# Altium PCB PCB_Board_4_Layout.PcbDoc
Units mil, origin at the board's own origin, x right, y up, seen from the top; angles counter-clockwise.
Board outline 4315 x 2510 mil, 4 copper layers (Top Layer 1, Ground 1, Ground 2, Bottom Layer 1), stack 70.112 mil thick; 80 components, 45 nets, 287 pads, 89 vias.
Unrouted connection lines stored in the file: 3.
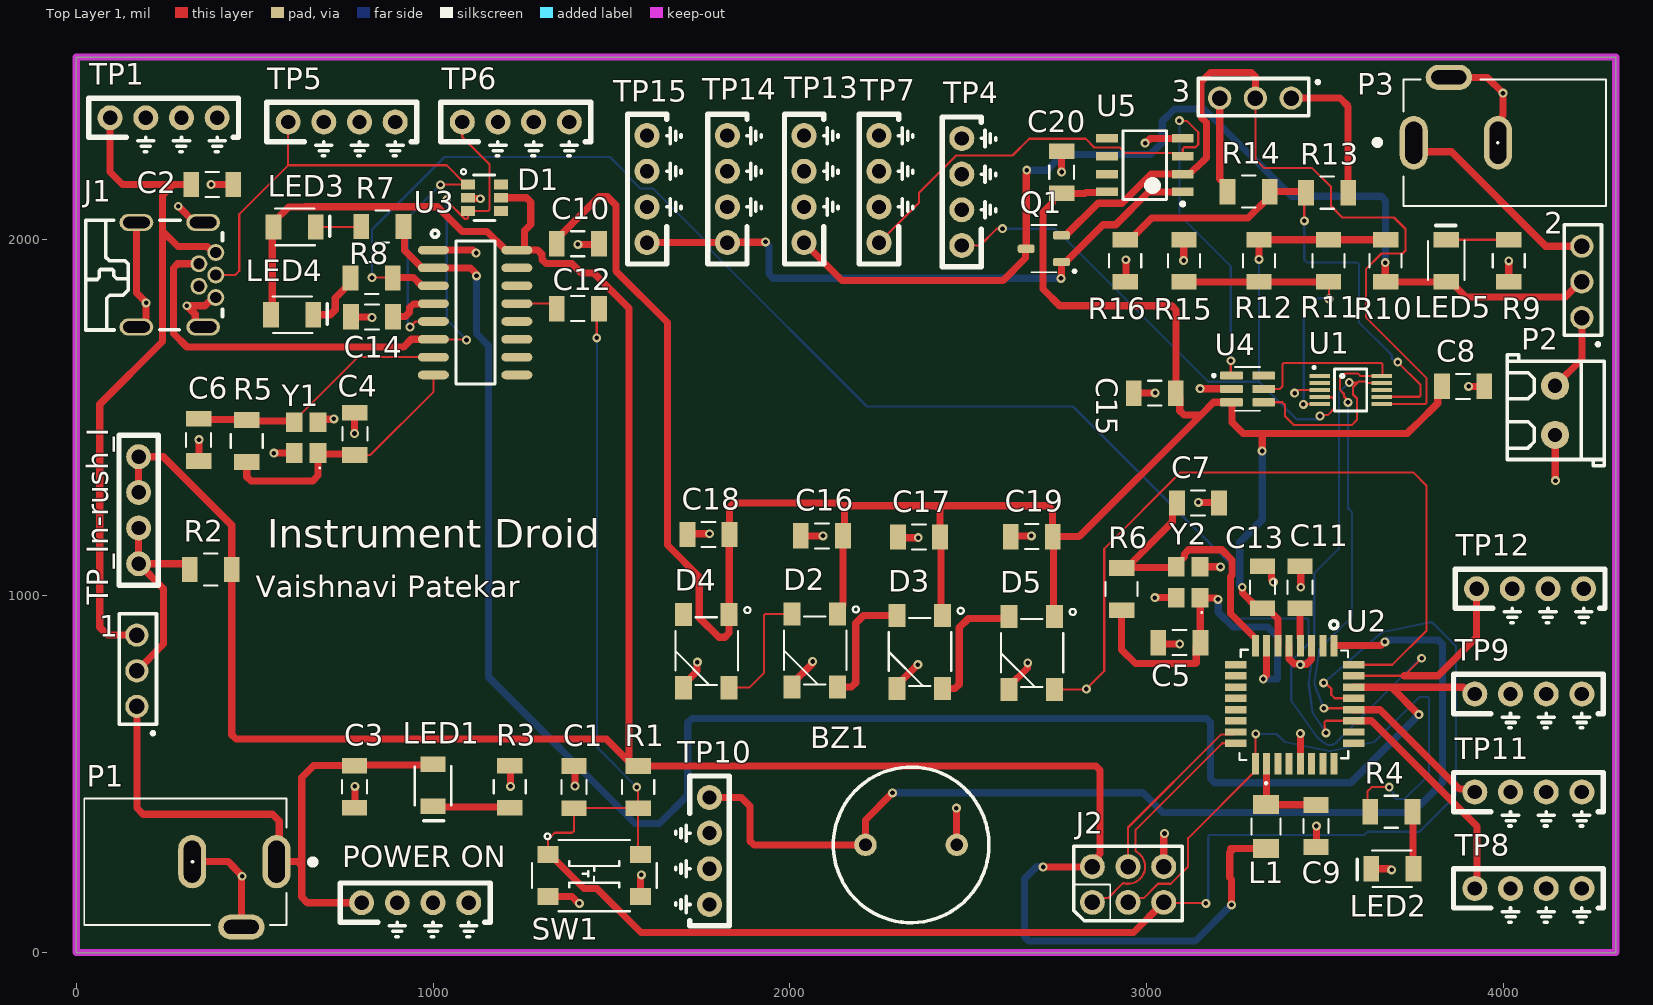
[diagram p0: Top Layer 1 view]
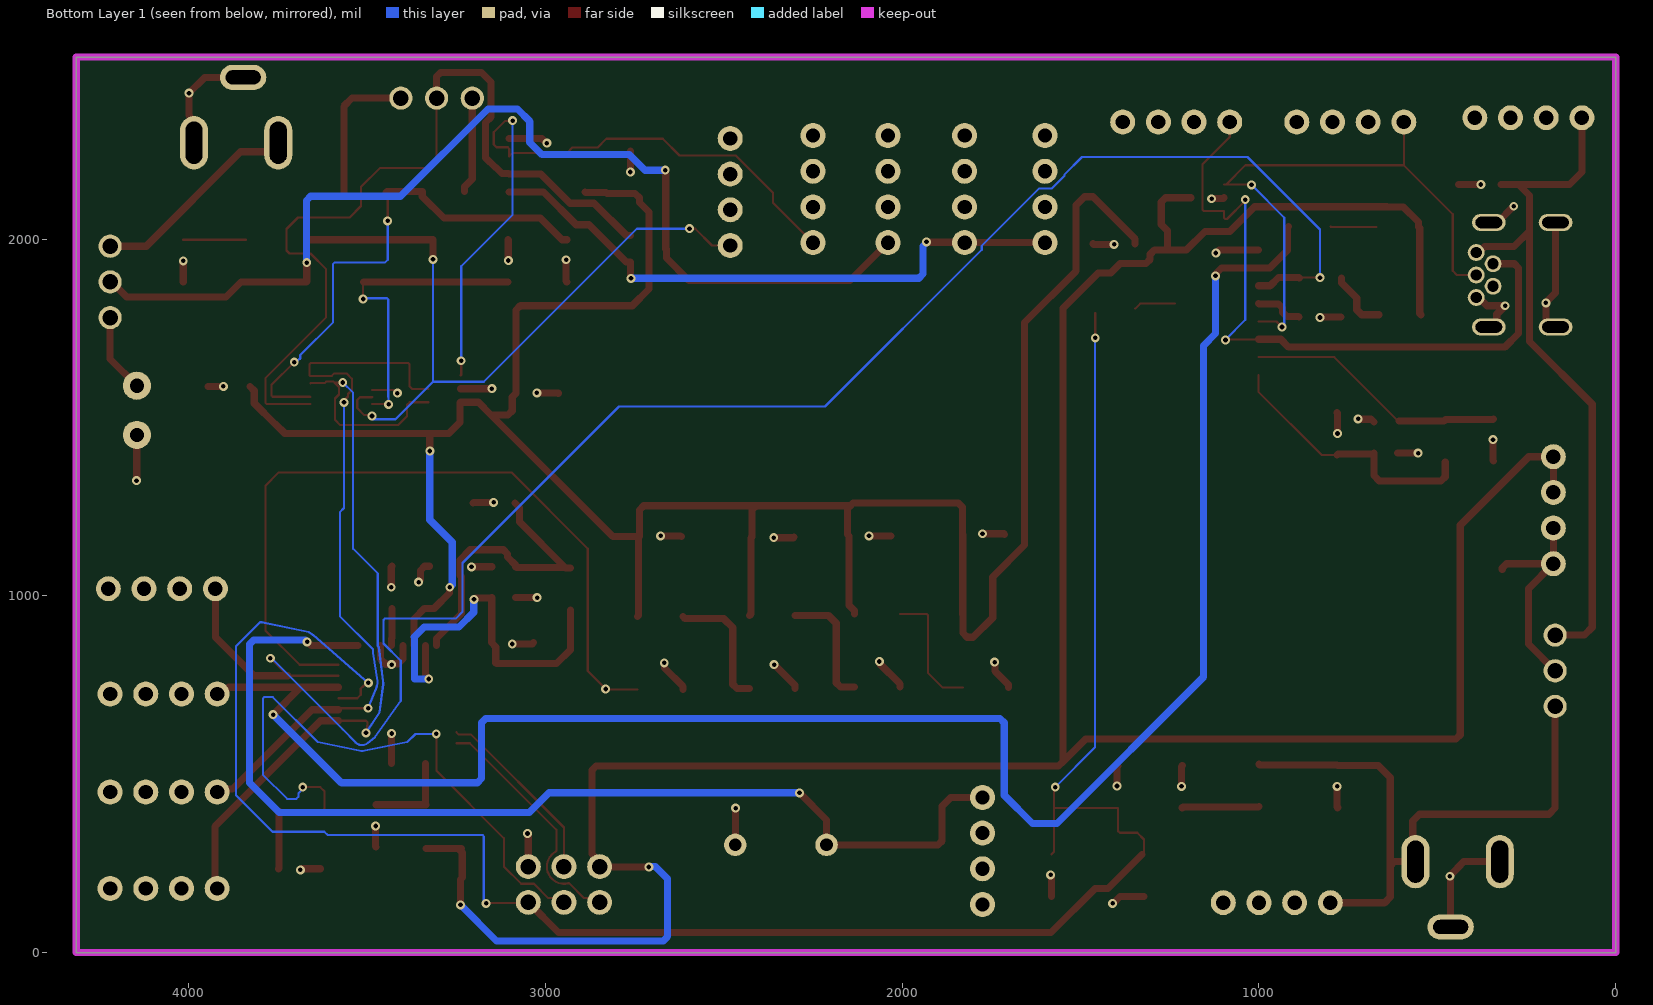
[diagram p1: Bottom Layer 1 view, seen from below]
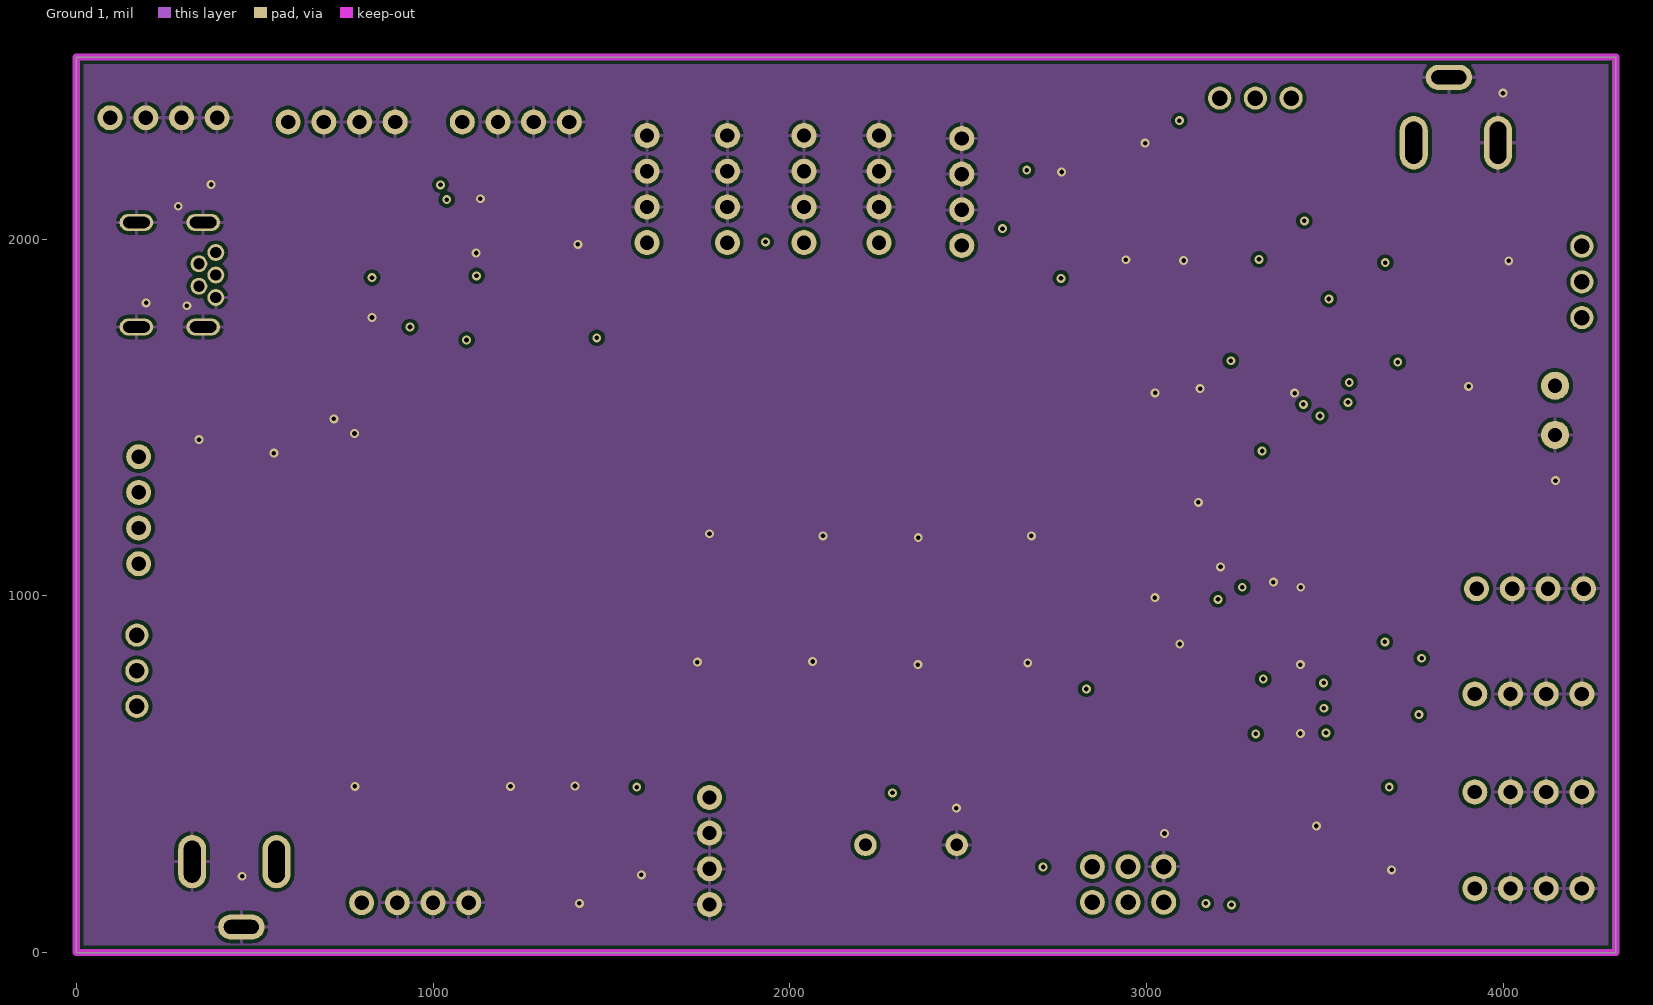
[diagram p2: Ground 1]
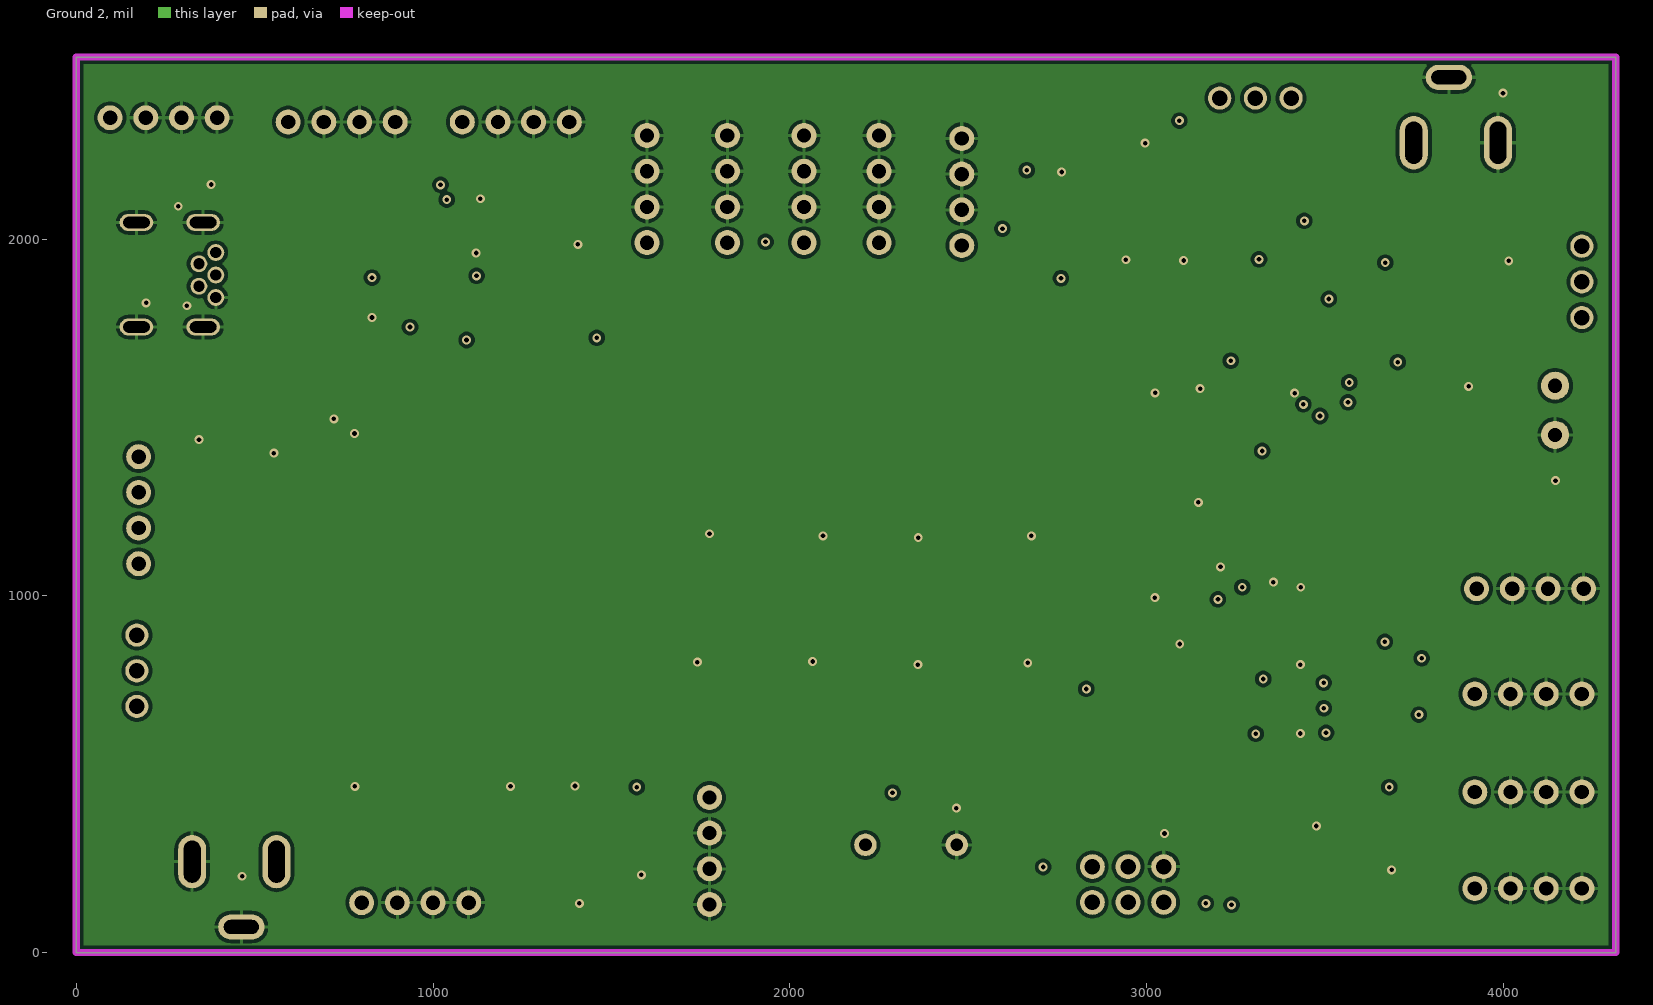
[diagram p3: Ground 2]
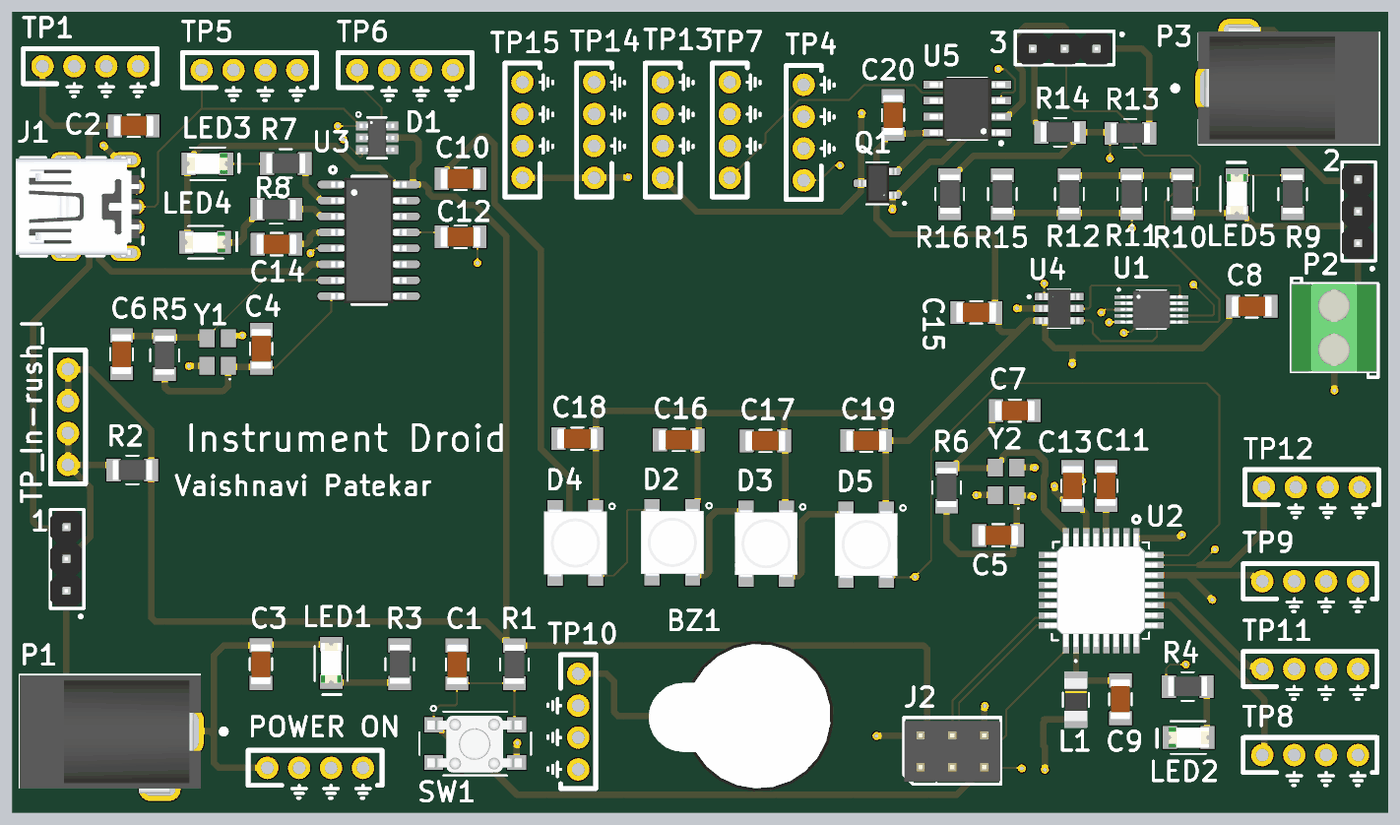
[diagram p4: 3D render of the assembled board from above, using the file's embedded part models]

## Layer stack, top to bottom
Top Solder: solder mask 0.4, Solder Resist, Dk 3.5
Top Layer 1: signal copper 1.378
Dielectric 2: prepreg 2.8, PP-006, Dk 4.1
Ground 1: signal copper 1.378
Dielectric 1: core 59, Core-043, Dk 4.3
Ground 2: signal copper 1.378
Dielectric 3: prepreg 2.8, PP-006, Dk 4.1
Bottom Layer 1: signal copper 1.378
Bottom Solder: solder mask 0.4, Solder Resist, Dk 3.5

## Board outline
0,0 4315,0 4315,2510 0,2510

## Design rules (kind name [scope] priority, off if disabled: settings)
BoardOutlineClearance [All] p1: gap=10 ignorepadtopadclearanceinfootprint=FALSE except(0: Arc-SplitContinuation Track-SplitContinuation SMDPad-SplitContinuation THPad-SplitContinuation Via-SplitContinuation Fill-SplitContinuation Poly-SplitContinuation Region-SplitContinuation Text-SplitContinuation)
Clearance [All] p1: gap=10 ignorepadtopadclearanceinfootprint=FALSE
HoleSize [All] p1: absolutevalues=TRUE maxlimit=120 minlimit=1 maxpercent=80.000 minpercent=20.000
PlaneClearance [All] p1: clearance=10
PlaneConnect [All] p1: planeconnectstyle=Direct reliefexpansion=20 reliefentries=4 reliefconductorwidth=10 reliefairgap=10
PolygonConnect [All] p1: thpad.connectstyle=Relief thpad.reliefconductorwidth=10 thpad.reliefentries=4 thpad.polygonreliefangle="90 Angle" thpad.airgapwidth=10 smdpad.connectstyle=Direct smdpad.reliefconductorwidth=10 smdpad.reliefentries=4 smdpad.polygonreliefangle="90 Angle" smdpad.airgapwidth=10 via.connectstyle=Direct via.reliefconductorwidth=10 via.reliefentries=4 via.polygonreliefangle="90 Angle" via.airgapwidth=10
RoutingVias [All] p1: holewidth=13 width=25 viastyle="Through Hole" minholewidth=13 minwidth=25 maxholewidth=60 maxwidth=80
SolderMaskExpansion [All] p1: expansion=4 istentingtop=FALSE
UnRoutedNet [All] p1: checkbadconnections=TRUE
Width "Schematic Width Constraint_5" [InNet('+5')] p1: maxlimit=100 minlimit=10 preferedwidth=20 toplayer_minwidth=20 midlayer1_maxwidth=10 midlayer1_prefwidth=10 midlayer2_maxwidth=10 midlayer2_prefwidth=10 bottomlayer_minwidth=20 minimp=50.000000 maximp=50.000000 favimp=50.000000
Width "Schematic Width Constraint_4" [InNet('GND')] p2: maxlimit=100 minlimit=10 preferedwidth=20 toplayer_minwidth=20 midlayer1_maxwidth=10 midlayer1_prefwidth=10 midlayer2_maxwidth=10 midlayer2_prefwidth=10 bottomlayer_minwidth=20 minimp=50.000000 maximp=50.000000 favimp=50.000000
Width "Schematic Width Constraint_3" [InNet('ADP_+5V')] p3: maxlimit=100 minlimit=10 preferedwidth=20 toplayer_minwidth=20 midlayer1_maxwidth=10 midlayer1_prefwidth=10 midlayer2_maxwidth=10 midlayer2_prefwidth=10 bottomlayer_minwidth=20 minimp=50.000000 maximp=50.000000 favimp=50.000000
Width "Schematic Width Constraint_2" [InNet('+5V')] p4: maxlimit=100 minlimit=10 preferedwidth=20 toplayer_minwidth=20 midlayer1_maxwidth=10 midlayer1_prefwidth=10 midlayer2_maxwidth=10 midlayer2_prefwidth=10 bottomlayer_minwidth=20 minimp=50.000000 maximp=50.000000 favimp=50.000000
Width "Schematic Width Constraint" [InNet('USB_+5V')] p5: maxlimit=100 minlimit=10 preferedwidth=20 toplayer_minwidth=20 midlayer1_maxwidth=10 midlayer1_prefwidth=10 midlayer2_maxwidth=10 midlayer2_prefwidth=10 bottomlayer_minwidth=20 minimp=50.000000 maximp=50.000000 favimp=50.000000
Width [All] p6: maxlimit=100 minlimit=6 preferedwidth=6 minimp=50.000000 maximp=50.000000 favimp=50.000000
26 further rules are at their usual default settings.

## Components (designator, comment, footprint, x,y, rotation, side; value= is the part's Value field where it differs from the comment)
1 "PREC003SAAN-RC" 3_PIN_100mil 170,690 r90 top value="CONN HEADER VERT 3POS 2.54MM"
2 "PREC003SAAN-RC" 3_PIN_100mil 4220,1780 r90 top value="CONN HEADER VERT 3POS 2.54MM"
3 "PREC003SAAN-RC" 3_PIN_100mil 3405,2395 r180 top value="CONN HEADER VERT 3POS 2.54MM"
BZ1 "AT-1224-TWT-5V-2-R" "BUZZER- TH" 2340,302 r90 top
C1 "1uF" 1206_Passive_Capacitor 1395,464 r90 top
C2 "22uF" 1206_Passive_Capacitor 381,2153 r180 top
C3 "22uF" 1206_Passive_Capacitor 780,465 r90 top
C4 "22pF" 1206_Passive_Capacitor 781,1454 r270 top
C5 "22pF" 1206_Passive_Capacitor 3092,869 r0 top
C6 "22pF" 1206_Passive_Capacitor 343,1437 r90 top
C7 "22pF" 1206_Passive_Capacitor 3144,1260 r180 top
C8 "22uF" 1206_Passive_Capacitor 3887,1587 r0 top
C9 "22uF" 1206_Passive_Capacitor 3475,355 r90 top
C10 "22uF" 1206_Passive_Capacitor 1406,1987 r180 top
C11 "22uF" 1206_Passive_Capacitor 3430,1024 r270 top
C12 "22uF" 1206_Passive_Capacitor 1406,1805 r180 top
C13 "22uF" 1206_Passive_Capacitor 3325,1024 r270 top
C14 "22uF" 1206_Passive_Capacitor 829,1782 r180 top
C15 "22uF" 1206_Passive_Capacitor 3023,1568 r180 top
C16 "22uF" 1206_Passive_Capacitor 2090,1168 r0 top
C17 "22uF" 1206_Passive_Capacitor 2362,1165 r0 top
C18 "22uF" 1206_Passive_Capacitor 1772,1172 r180 top
C19 "22uF" 1206_Passive_Capacitor 2678,1166 r0 top
C20 "22uF" 1206_Passive_Capacitor 2762,2187 r90 top
D1 "SRV05-4-P-T7" TVS 1143.77,2115.6 r0 top value="TVS DIODE 5.5V 6TSOP"
D2 "IN-PI55QATPRPGPBPW" "SERIAL_LED - duplicate" 2070,847 r270 top
D3 "IN-PI55QATPRPGPBPW" "SERIAL_LED - duplicate" 2364,843 r270 top
D4 "IN-PI55QATPRPGPBPW" "SERIAL_LED - duplicate" 1766,845 r270 top
D5 "IN-PI55QATPRPGPBPW" "SERIAL_LED - duplicate" 2678,840 r270 top
J1 "USB Mini" USB_MINI_B 280,1900 r270 top value="USB mini B"
J2 "NRPN032PAEN-RC" ICSP 2848,141 r90 top
L1 "FB_10uH_1206" AIML-1206_ABR-M 3335,353.5 r270 top
LED1 "Red" LED_1206 1000,469 r270 top
LED2 "Red" LED_1206 3689,235 r180 top
LED3 "Yellow" LED_1206 612,2034 r0 top
LED4 "Green" LED_1206 605,1788 r0 top
LED5 "Red" LED_1206 3840,1939 r90 top
P1 "Power Jack" Power_Jack 561.22,255 r180 top value="CONN PWR JACK 2X5.5MM SOLDER"
P2 "2P Screw Terminal Block" "P_Terminal block 3.5mm-pitch" 4145,1520 r270 top
P3 "Power Jack" Power_Jack 3748.78,2270 r0 top value="CONN PWR JACK 2X5.5MM SOLDER"
"POWER ON" "10x Probe TP" TP10x_Probe 950,140 r0 top
Q1 "AO3400A" N-MOSFET 2712,1973 r180 top value="N channel"
R1 "10k" 1206_Passive_Resitor 1575,464 r90 top value=10KOhm
R2 "500m" 1206_Passive_Resitor 377,1074 r0 top value=500mOhm
R3 "1k" 1206_Passive_Resitor 1215,465 r270 top value="1K Ohm"
R4 "1k" 1206_Passive_Resitor 3686,395 r0 top value="1K Ohm"
R5 "1M" 1206_Passive_Resitor 478,1434 r90 top value="1M Ohm"
R6 "1M" 1206_Passive_Resitor 2930,1019 r90 top value="1M Ohm"
R7 "1k" 1206_Passive_Resitor 858,2035 r180 top value="1K Ohm"
R8 "1k" 1206_Passive_Resitor 828,1891 r180 top value="1K Ohm"
R9 "10k" 1206_Passive_Resitor 4015,1939 r270 top value=10KOhm
R10 "10k" 1206_Passive_Resitor 3670,1939 r270 top value=10KOhm
R11 "10k" 1206_Passive_Resitor 3510,1939 r90 top value=10KOhm
R12 "10k" 1206_Passive_Resitor 3315,1939 r90 top value=10KOhm
R13 "10 Ohm" 1206_Passive_Resitor 3506,2130 r180 top
R14 "1 Ohm" 1206_Passive_Resitor 3286,2133 r180 top
R15 "0 Ohm" 1206_Passive_Resitor 3105,1939 r270 top
R16 "0 Ohm" 1206_Passive_Resitor 2940,1939 r90 top
SW1 "TL3305AF160QG" Switch_JLC 1452,216 r0 top
TP1 "10x Probe TP" TP10x_Probe 245,2340 r0 top
TP4 "TP_VRM+" TP10x_Probe 2482,2132 r90 top
TP5 "TP_USB_D+" TP10x_Probe 744,2328 r0 top
TP6 "TP_USB_D-" TP10x_Probe 1232,2328 r0 top
TP7 "TP_DAC_Vout" TP10x_Probe 2250,2140 r90 top
TP8 "TP_SDA" TP10x_Probe 4070,180 r0 top
TP9 "TP_RxD" TP10x_Probe 4070,725 r0 top
TP10 "TP_Buzzer" TP10x_Probe 1775,285 r270 top
TP11 "TP_SCL" TP10x_Probe 4070,450 r0 top
TP12 "TP_TxD" TP10x_Probe 4075,1020 r0 top
TP13 "TP_Vth" TP10x_Probe 2040,2140 r90 top
TP14 "TP_Comp_Out" TP10x_Probe 1825,2140 r90 top
TP15 "TP_Op_Amp_Vout" TP10x_Probe 1600,2140 r90 top
TP_In-rush_I "TP_In-rush_current" TP10x_Floating 175,1240 r90 top
U1 "ADS1115IDGSR" ADC_ADS1115IDGSR 3572,1577 r0 top
U2 "ATMEGA328P-ANR" ATMega328P 3415,695 r90 top value="IC MCU 8BIT 32KB FLASH 32TQFP"
U3 "CH340G" "USB to serial" 1118,1794 r270 top value="USB to Serial"
U4 "DAC IC" MCP4725 3283.08,1580 r0 top
U5 "MCP6002T-I/SN" SOIC127P600X175-8N 2995,2207 r180 top
Y1 "X322512MSB4SI" "Crystal resonator" 642.5,1443.68 r90 top value=12MHz
Y2 "X322516MLB4SI" "Crystal resonator" 3114.57,1038.3 r90 top value=16MHz

## Footprints (in the part's own frame and the unit in brackets; to place one, negate y for a bottom-side part, rotate by r counter-clockwise, add the part's x,y. Pads: shape width x height; smd on the part's side, far side on the other; paste and mask are expansions set on the pad)
3_PIN_100mil [mm]
  round 1.65 hole 1.1: 1(0,0) 2(2.54,0) 3(5.08,0)
  silkscreen extent -2,-1.4 6.6,1.27, body extent -1.14,-1.27 6.48,1.27, height 8.38
1206_Passive_Capacitor [mil]
  rect 44x71 smd: 1(-59,0) 2(59,0)
  silkscreen extent -19,-35 19,35, body extent -63,-31 63,32, height 50
1206_Passive_Resitor [mil]
  rect 44x71 smd: 1(-59,0) 2(59,0)
  silkscreen extent -19,-45 19,45, body extent -61,-31 61,31, height 26
ADC_ADS1115IDGSR [mm] "*SOP50P490X110-10N"
  rect 1.45x0.3 smd mask+0.025: 1(-2.2,1)
  rect 1.47x0.3 smd mask+0.025: 2(-2.2,0.5) 3(-2.2,0) 4(-2.2,-0.5) 5(-2.2,-1) 6(2.2,-1) 7(2.2,-0.5) 8(2.2,0) 9(2.2,0.5) 10(2.2,1)
  silkscreen extent -2.68,-1.5 1.15,1.68, body extent -2.44,-1.49 2.46,1.51, height 1.1
AIML-1206_ABR-M [mil]
  rect 54x73 smd paste+0 mask+0: 1(-61.5,0) 2(61.5,0)
  silkscreen extent -124,-41 22,41, body extent -66,-36 66,36, height 55
ATMega328P [mm]
  rect 1.55x0.508 smd mask+0.025: 1(4.2,-2.794) 2(4.2,-2.007) 3(4.2,-1.194) 4(4.2,-0.406) 5(4.2,0.406) 6(4.2,1.194) 7(4.2,2.007) 8(4.2,2.794) 17(-4.2,2.794) 18(-4.2,2.007) 19(-4.2,1.194) 20(-4.2,0.406) 21(-4.2,-0.406) 22(-4.2,-1.194) 23(-4.2,-2.007) 24(-4.2,-2.794)
  rect 0.508x1.55 smd mask+0.025: 9(2.843,4.2) 10(2.056,4.2) 11(1.243,4.2) 12(0.455,4.2) 13(-0.357,4.2) 14(-1.145,4.2) 15(-1.958,4.2) 16(-2.745,4.2) 25(-2.745,-4.2) 26(-1.958,-4.2) 27(-1.145,-4.2) 28(-0.357,-4.2) 29(0.455,-4.2) 30(1.243,-4.2) 31(2.056,-4.2) 32(2.843,-4.2)
  silkscreen extent -3.94,-3.81 5.97,3.94, body extent -4.45,-4.47 4.55,4.53, height 1.16
"BUZZER- TH" [mm]
  round 1.6 hole 0.9: 1(0,3.25) 2(0,-3.25)
  silkscreen extent -5.54,-5.54 5.54,5.53, body extent -6,-6 6,8.75, height 9.05
"Crystal resonator" [mil]
  rect 55.11x47.24 smd: 1(-43.3,-35.43) 2(43.31,-35.43) 3(43.32,31.5) 4(-43.3,31.5)
  silkscreen extent -87,-42 -83,-38, body extent -65,-47 65,47, height 31
ICSP [mil]
  round 70 hole 43.31: 1(0,0) 2(0,-100) 3(0,-200) 4(100,0) 5(100,-100) 6(100,-200)
  silkscreen extent -52,-252 157,52, body extent -44,-250 146,50, height 330
LED_1206 [mil]
  rect 44x71 smd: 1(-59,0) 2(59,0)
  silkscreen extent -54,-51 99,51, body extent -63,-31 63,31, height 28
MCP4725 [mm]
  rrect25% 1.61x0.59 smd: 1(-1.145,0.95) 2(-1.145,0) 3(-1.145,-0.95) 4(1.145,-0.95) 5(1.145,0) 6(1.145,0.95)
  silkscreen extent -2.5,-1.56 0.9,1.56, body extent -1.6,-1.55 1.6,1.55, height 1.45
N-MOSFET [mm]
  rrect50% 1.21x0.59 smd: 1(-1.255,0.95) 2(-1.255,-0.95) 3(1.255,0)
  silkscreen extent -2.28,-1.68 0.89,1.7, body extent -1.55,-1.55 1.45,1.55, height 1.25
"P_Terminal block 3.5mm-pitch" [mm]
  round 2 hole 1: 1(-1.75,0) 2(1.75,0)
  silkscreen extent -3.95,-3.4 3.95,3.5, body extent -3.5,-3.4 3.5,3.4, height 8.4
Power_Jack [mm]
  oval 2x3.8 hole 1.2 slot 3 at 90 deg: 1(0,0) 2(6,0)
  oval 3.3x1.8 hole 1 slot 2.5 at 0 deg: 3(2.5,4.65)
  silkscreen extent -2.79,-4.5 13.68,4.5, body extent -0.76,-4.45 13.64,4.95, height 11.49
"SERIAL_LED - duplicate" [mil] "Footprint for serial LED"
  rect 64.96x47.5 smd: 1(-102.36,63.5) 2(-102.36,-63.5) 3(102.36,-63.5) 4(102.36,63.5)
  silkscreen extent -124,-87 95,124, body extent -106,-98 106,98, height 63
SOIC127P600X175-8N [mm] "SOIC, 8-Leads, Body 4.90x3.90mm, Pitch 1.27mm, IPC Medium Density"
  rect 1.55x0.6 smd: 1(-2.7,1.905) 2(-2.7,0.635) 3(-2.7,-0.635) 4(-2.7,-1.905) 5(2.7,-1.905) 6(2.7,-0.635) 7(2.7,0.635) 8(2.7,1.905)
  silkscreen extent -2.83,-2.45 1.55,2.88, body extent -3,-2.45 3,2.45, height 1.75
Switch_JLC [mm]
  rect 1.5x1.2 smd: 1(-3.3,1.5) 2(3.3,1.5) 3(-3.3,-1.5) 4(3.3,-1.5)
  silkscreen extent -4.44,-2.54 4.45,3, body extent -3.8,-2.29 3.7,2.21, height 3.7
TP10x_Floating [mil] "Small Probs footprint"
  round 70 hole 40: 1(-150,0) 2(-50,0) 3(50,0) 4(150,0)
  silkscreen extent -210,-55 210,55
TP10x_Probe [mil] "Small Probs footprint"
  round 70 hole 40: 1(-150,0) 2(-50,0) 2(50,0) 2(150,0)
  silkscreen extent -210,-95 210,55
TVS [mm]
  rect 1x0.7 smd mask+0.025: 1(-1.162,0.95) 2(-1.162,0) 3(-1.162,-0.95) 4(1.2,-0.95) 5(1.2,0) 6(1.2,0.95)
  silkscreen extent -1.65,-1.63 0.76,2.03, body extent -1.37,-1.44 1.38,1.46, height 1.1
"USB to serial" [mil]
  oval 24x86.61 smd: 1(-175,-117) 2(-125,-117) 3(-75,-117) 4(-25,-117) 5(25,-117) 6(75,-117) 7(125,-117) 8(175,-117) 9(175,117) 10(125,117) 11(75,117) 12(25,117) 13(-25,117) 14(-75,117) 15(-125,117) 16(-175,117)
  silkscreen extent -231,-122 201,56, body extent -197,-118 197,118, height 71
USB_MINI_B [mm]
  round 1.2 hole 0.8: 1(-1.58,2.826) 2(-0.78,1.622) 3(0.02,2.826) 4(0.82,1.622) 5(1.62,2.826)
  oval 1.2x2.4 hole 0.8 slot 1.9 at 90 deg: 6(-3.72,1.924) 7(3.72,1.924) 8(-3.72,-2.826) 9(3.72,-2.826)
  silkscreen extent -3.89,-6.42 3.93,3.3, body extent -4.04,-6.83 4.06,3.02, height 3.98

## Part data
1 2 3: library part SW_3Pin_100mil_Switch, "Connector Header Through Hole 3 position 0.100\" (2.54mm)", LCSC Part#=C49257, Digikey Link=https://www.digikey.com/product-detail/en/PREC003SAAN-RC/S1012EC-03-ND/2774851/?itemSeq=304982371, MFR Part #=PREC003SAAN-RC, Type=Extended
BZ1: library part BUZZER_1, "Buzzers Transducer, Externally Driven Electromechanical/Magnetic 5 V 40mA 2.4kHz 87dB @ 5V, 10cm Through Hole PC Pins", Datasheet=https://www.puiaudio.com/media/SpecSheet/AT-1224-TWT-5V-2-R.pdf, MFR Part #=AT-1224-TWT-5V-2-R
C1: library part C_1uF_1206, "MULTILAYER CERAMIC CAPACITORS MLCC - SMD/SMT 1UF 50V 1206 ROHS", LCSC Part#=C1848, MFR Part #=CL31B105KBHNNNE, Digikey Link=https://www.digikey.com/product-detail/en/C1206C105M4RACTU/399-8150-1-ND/3471873/?itemSeq=304982366, Type=Basic
C2 C3 C8 C9 C10 C11 C12 C13 C14 C15 C16 C17 C18 C19 C20: library part C_22uF_1206, "22uF ±10% 25V X5R 1206 Multilayer Ceramic Capacitors MLCC - SMD/SMT RoHS", LCSC Part#=C12891, MFR Part #=CL31A226KAHNNNE, Datasheet=https://datasheet.lcsc.com/lcsc/1811031514_Samsung-Electro-Mechanics-CL31A226KAHNNNE_C12891.pdf, Type=basic
C4 C5 C6 C7: library part C_22pF_1206, "22pF ±5% 1kV C0G 1206 Multilayer Ceramic Capacitors MLCC - SMD/SMT RoHS", LCSC Part#=C313096, MFR Part #=1206CG220J102NT, Datasheet=https://datasheet.lcsc.com/lcsc/1810311150_FH-Guangdong-Fenghua-Advanced-Tech-1206CG220J102NT_C313096.pdf, Type=Extended
D1: library part D_TVS_Diode, "TVS SOT-23-6 ROHS", LCSC Part#=C85364, Datasheet=https://datasheet.lcsc.com/szlcsc/ProTek-Devices-SRV05-4-P-T7_C85364.pdf, MFR Part #=SRV05-4-P-T7, Type=Basic
D2 D3 D4 D5: library part LED_Smart, "LIGHT EMITTING DIODES (LED) RGB 620~630NM RED, 520~530NM GREEN, 465~475NM BLUE 600MCD@16MARED,1200MCD@16MAGREEN,300MCD@16MABLUE TOP VIEW SMD-4 ROHS", LCSC Part#=C2761795, Manufacturer=Inolux, MFR Part #=IN-PI55QATPRPGPBPW-60, Datasheet=https://datasheet.lcsc.com/lcsc/2106062036_Worldsemi-WS2812B-B-W_C2761795.pdf
J1: library part J_USB_B_Mini, "Through Hole USB Connectors RoHS", LCSC Part#=C46398, MFR Part #=920-462A2021D10102, Datasheet=https://datasheet.lcsc.com/szlcsc/2103081233_Jing-Extension-of-the-Electronic-Co-920-462A2021D10102_C46398.pdf, Type=Extended
J2: library part J_ICSP, "Connector Header Through Hole 6 position 0.079\" (2.00mm)", LCSC Part#=C124384, Digikey Link=https://www.digikey.com/product-detail/en/NRPN032PAEN-RC/S5801-03-ND/804955/?itemSeq=304982355, MFR Part #=NRPN032PAEN-RC, Type=Extended
L1: "25mA 10uH ±10% 800mΩ 1206  Inductors (SMD) ROHS", LCSC Part#=C1051, MFR Part #=CMI321609X100KT, Mfr_Name="FH (Guangdong Fenghua Advanced Tech)", Datasheet=https://datasheet.lcsc.com/lcsc/1810311314_FH--Guangdong-Fenghua-Advanced-Tech-CMI321609X100KT_C1051.pdf, Type=Basic
LED1 LED2 LED5: library part LED_RED_1206, "Red 621~631nm 1206 Light Emitting Diodes (LED) RoHS", LCSC Part#=C93133, MFR Part #=15-21/R6C-FQ1R1B/2T, Datasheet=https://datasheet.lcsc.com/szlcsc/1811151241_Everlight-Elec-15-21-R6C-FQ1R1B-2T_C93133.pdf, Type=Extended
LED3: library part LED_YELLOW_1206, "yellow 1206  Light Emitting Diodes (LED) ROHS", LCSC Part#=C93094, MFR Part #=NCD1206Y1, Datasheet=https://datasheet.lcsc.com/lcsc/2008201033_Foshan-NationStar-Optoelectronics-NCD1206Y1_C93094.pdf, Type=Extended
LED4: library part LED_GREEN_1206, "Green 513~528nm 1206 Light Emitting Diodes (LED) RoHS", LCSC Part#=C434439, MFR Part #=SZYY1206G, Datasheet=https://datasheet.lcsc.com/lcsc/2006301532_Yongyu-Photoelectric-SZYY1206G_C434439.pdf, Type=Extended
P1 P3: library part "P_Power Jack", "Power Barrel Connector Jack 2.10mm ID (0.083\"), 5.50mm OD (0.217\") Through Hole, Right Angle", LCSC Part#=C136744, MFR Part #=PJ-102A, Digikey Link=https://www.digikey.com/product-detail/en/PJ-102A/CP-102A-ND/275425/?itemSeq=304982367, Type=Extended
P2: library part "P_Terminal block", "Green Straight pin 3.5mm  pitch; P=3.5mm  Screw terminal ROHS", LCSC Part#=C474892, Manufacturer="Cixi Kefa Elec", MFR Part #=KF350-3.5-2P, Datasheet=https://datasheet.lcsc.com/lcsc/2001160007_Cixi-Kefa-Elec-KF350-3-5-2P_C474892.pdf
"POWER ON" TP1 TP4 TP5 TP6 TP7 TP8 TP9 TP10 TP11 TP12 TP13 TP14 TP15: library part TP_10x_Probe, "Test Point 300 mil centers"
Q1: library part Q_Nch_MOSFET, "MOSFET N Trench 30V 5.7A 1.5V @ 250uA 26.5 m? @ 5.7A,10V SOT-23-3L RoHS", LCSC Part#=C20917, Datasheet=https://datasheet.lcsc.com/szlcsc/Alpha-Omega-Semicon-AOS-AO3400A_C20917.pdf, MFR Part #=AO3400A, Type=Basic
R1 R9 R10 R11 R12: library part R_10KOhm_1206, "10 kOhms ±5% 0.25W, 1/4W Chip Resistor 1206 (3216 Metric) Automotive AEC-Q200 Thick Film", LCSC Part#=C17902, MFR Part #=RMCF1206FT10K0, Digikey Link=https://www.digikey.com/en/products/detail/stackpole-electronics-inc/RMCF1206FT10K0/1759669, Type=Basic
R2: library part R_500mOhm_1206, "Resistors/Shunt 250mW 500mΩ ±800ppm/℃ ±5% 1206  Current Sense  Resistors ROHS", LCSC Part#=C247433, MFR Part #=1206W4J050KT5E, Datasheet=https://datasheet.lcsc.com/lcsc/1810301438_UNI-ROYAL-Uniroyal-Elec-1206W4J050KT5E_C247433.pdf, Type=Extended
R3 R4 R7 R8: library part R_1K_1206, "CHIP RESISTOR - SURFACE MOUNT 1KOHMS ±1% 1/4W 1206 ROHS", LCSC Part#=C4410, MFR Part #=RNCP1206FTD1K00CT, Digikey Link=https://www.digikey.com/product-detail/en/RNCP1206FTD1K00/RNCP1206FTD1K00CT-ND/2240675/?itemSeq=304982373, Type=Basic
R5 R6: library part R_1M_1206, "CHIP RESISTOR - SURFACE MOUNT 1MOHMS ±1% 1/4W 1206 ROHS", LCSC Part#=C17927, MFR Part #=RMCF1206JT1M00, Digikey Link=https://www.digikey.com/product-detail/en/RMCF1206JT1M00/RMCF1206JT1M00CT-ND/1942830/?itemSeq=304982358, Type=Basic
R13: library part R_10Ohm_1206, "CHIP RESISTOR - SURFACE MOUNT 0.1OHMS ±1% 1/4W 1206 ROHS", LCSC Part#=C17903, MFR Part #=1206W4F100JT5E, Datasheet=https://datasheet.lcsc.com/szlcsc/Uniroyal-Elec-1206W4F100JT5E_C17903.pdf, Type=Basic
R14: library part R_1Ohm_1206, "1Ω ±5% 0.25W ±400ppm/℃ 1206 Chip Resistor - Surface Mount RoHS", LCSC Part#=C1409, MFR Part #=1206W4J010JT5E, Datasheet=https://datasheet.lcsc.com/lcsc/1810301410_UNI-ROYAL-Uniroyal-Elec-1206W4J010JT5E_C1409.pdf, Type=Extended
R15 R16: library part R_0Ohm_1206, "CHIP RESISTOR - SURFACE MOUNT 0OHMS ±1% 1/4W 1206 ROHS", LCSC Part#=C17888, MFR Part #=1206W4F0000T5E, Datasheet=https://datasheet.lcsc.com/szlcsc/Uniroyal-Elec-1206W4F0000T5E_C17888.pdf, Mouser link=https://www.mouser.com/ProductDetail/Royalohm/1206W4F0000T5E?qs=e8oIoAS2J1Thbopin%252BsagQ%3D%3D, Type=Basic
SW1: library part SW_Push_Button_JLC, "Tactile Switch SPST-NO Top Actuated Surface Mount", LCSC Part#=C2837550, MFR Part #=KH-4.5X4.5X4.3H-STM, Datasheet=https://datasheet.lcsc.com/lcsc/2106081532_Shenzhen-Kinghelm-Elec-KH-4.5X4.5X4.3H-STM_C2837550.pdf, Type=Extended
TP_In-rush_I: library part TP_10x_Floating, "Test Point 300 mil centers"
U1: library part U_ADC_ADS1115IDGSR, "16-Bit ADC with Integrated MUX, PGA, Comparator, Oscillator, and Reference 10-VSSOP -40 to 125", LCSC Part#=C37593, Package="MSOP-10 Texas Instruments", Digikey Link=https://www.digikey.com/product-detail/en/texas-instruments/ADS1115IDGSR/296-38849-1-ND/5142969?utm_source=snapeda&utm_medium=aggregator&utm_campaign=symbol, MFR Part #=ADS1115IDGSR, SnapEDA_Link=https://www.snapeda.com/parts/ADS1115IDGSR/Texas%20Instruments/view-part/?ref=snap, Type=Extended
U2: library part U_ATMega328P, "AVR AVR® ATmega Microcontroller IC 8-Bit 20MHz 32KB (16K x 16) FLASH 32-TQFP (7x7)", LCSC Part#=C14877, MFR Part #=ATMEGA328P-AU, Digikey Link=https://www.digikey.com/product-detail/en/ATMEGA328P-ANR/ATMEGA328P-ANRCT-ND/2774230/?itemSeq=304982365, Type=Basic
U3: library part U_USBtoSerial, "Transceiver USB 2.0 2Mbps SOP-16_150mil USB ICs RoHS", LCSC Part#=C14267, Datasheet=https://datasheet.lcsc.com/lcsc/2008191806_WCH-Jiangsu-Qin-Heng-CH340G_C14267.pdf, MFR Part #=CH340G, Type=Basic
U4: library part U_MCP4725A0T-E/CH, "IC DAC 12BIT V-OUT SOT23-6", LCSC Part#=C144198, MFR Part #=MCP4725A0T-E/CH, Datasheet=https://ww1.microchip.com/downloads/en/DeviceDoc/22039d.pdf, Type=Extended
U5: library part U_MCP6002T-I/SN, "0.6 V/us 2 1MHz 1.8V ~ 6V 100μA General Purpose SOIC-8_150mil  Operational Amplifier ROHS", LCSC Part#=C7377, Mfr=Microchip, Datasheet=https://ww1.microchip.com/downloads/en/DeviceDoc/MCP6001-1R-1U-2-4-1-MHz-Low-Power-Op-Amp-DS20001733L.pdf, MFR Part #=MCP6002T-I/SN, Type=Basic
Y1: library part X_12MHz_Res, "SMD Crystal Resonators 12MHz ±10ppm SMD-3225_4P RoHS", LCSC Part#=C9002, Datasheet=https://datasheet.lcsc.com/szlcsc/Yangxing-Tech-X322512MSB4SI_C9002.pdf, MFR Part #=X322512MSB4SI, Type=Basic
Y2: library part X_16Mhz_Res, "±10ppm 16000000Hz -40℃~85℃ 贴片无源晶振 60Ω 9pF SMD3225-4P Crystals ROHS", LCSC Part#=C13738, MFR Part #=X322516MLB4SI, Type=Basic

## Via types
v1: diameter 25, hole 13, Top Layer 1 to Bottom Layer 1, 89 vias

## Nets (pads, with @x,y where several pads share a name; then routed paths per layer and width w, separated by ;. In a path a pad name is that pad's centre, name@x,y a point inside that pad or via, vN(x,y) a via of type N, cw(c..) or ccw(c..) an arc to the next point about the centre after c; other vN are vias at no path point)
12MHz_Osc-1: C4.2 R5.1 U3.8 Y1.1 | length 761.9
  Top Layer 1 w6: C4.2 825,1395 1001,1571 U3.8
  Top Layer 1 w20: R5.1 478,1333.72 489.72,1322 663,1322 677.93,1336.93 Y1.1 680.62,1397.69 778.31,1397.69 C4.2
12MHz_Osc-2: C6.2 R5.2 U3.7 Y1.3 | length 735.2
  Top Layer 1 w6: Y1.3 611,1490.93 789.07,1669 U3.7
  Top Layer 1 w20: C6.2 344.5,1494.5 476.5,1494.5 R5.2 481,1490 Y1.3@608,1490
"16MHz Osc-1": C5.2 R6.1 U2.7 Y2.1 | length 1063.9
  Top Layer 1 w20: R6.1 2930,849 2969,810 3137.28,810 3139,811.72 3139,857 C5.2 3150.5,869.5 Y2.1@3150.5,994.5 ; Y2.1 Y2.1@3150.5,994.5 ; v1(3200,990) 3196,994 3151,994 Y2.1@3150.5,994.5 ; v1(3327,767) 3327,768.35 3336,777.35 U2.7
  Bottom Layer 1 w20: v1(3200,990) 3200.96,989.04 3200.96,953.99 3241.95,913 3339.43,913 3367.72,884.72 3367,884 3367,767 v1(3327,767)
"16MHz Osc-2": C7.2 R6.2 U2.8 Y2.3 | length 858.5
  Top Layer 1 w20: R6.2 2943.5,1078 R6.2@2945.31,1079.81 ; C7.2 3073,1248 3073,1207.5 R6.2@2945.31,1079.81 ; U2.8 3305,880.87 3235.5,950.37 3235.5,1053.5 3239.5,1057.5 3239.5,1100.46 3210.79,1129.17 3118.1,1129.17 3106.38,1117.45 3106.38,1108.86 3083.07,1085.56 Y2.3 3081.26,1079.81 R6.2@2945.31,1079.81
328_MISO: J2.1 U2.16 | length 691.6
  Top Layer 1 w6: J2.1 2859.88,152.88 2892,152.88 2933.48,194.36 2935.96,194.36 2936.66,194.36 ccw(c2948,241) 2969.32,197.99 ccw(c2948,241) 2971.65,282.77 2971.09,283.33 2969.33,285.09 2969.33,344.37 3211.89,586.93 U2.16
328_MOSI: J2.5 U2.15 | length 522
  Top Layer 1 w6: J2.5 2948,350.63 3208.3,610.93 3242.65,610.93 U2.15
328_SCK: J2.2 R4.1 U2.17 | length 1716.5
  Top Layer 1 w6: J2.2 2959.88,152.88 2992,152.88 3032.12,193 3067.88,193 3116.5,241.62 3116.5,320.63 3305,509.13 U2.17 3305,612 v1(3306,613) ; R4.1 3619,403 3619,452 3631,464 v1(3680,464)
  Bottom Layer 1 w6: v1(3306,613) 3364.1,613 3386.84,590.26 3387.11,589.99 3505.96,566.29 ccw(c3514,607) 3522.3,566.34 3638.04,590.04 3638.26,590.26 3764,716 3788.49,716 3792,712.49 3792,499 3724,431 3698,431 3692.12,436.88 3692.12,446.74 3680,458.86 v1(3680,464)
+5: C8.1 C10.2 C13.2 C15.1 C16.2 C17.2 C18.1 C19.2 C20.1 D2.1 D3.1 D4.1 D5.1 U1.8 U2.6 U3.16 U4.3 U5.8 | length 7051.4
  Top Layer 1 w20: C10.2 1347,2000.5 1465.22,2118.72 1489.28,2118.72 1513,2095 1513,1910 1657.11,1765.89 1657.11,1142.11 1746.25,1052.97 1746.25,938.75 1801.22,883.78 1817.78,883.78 1829.5,895.5 D4.1 1830.25,948.11 1830.25,1171.25 C18.1 1831,1248.28 1842.72,1260 2138,1260 2145.5,1252.5 ; D2.1 2133.5,958.09 2149,973.59 C16.2 2153,1172 2153,1245 2145.5,1252.5 ; D3.1 2424.25,948.61 2424.25,1161.75 C17.2 2421,1240.78 2409.28,1252.5 ; D5.1 2739.25,944.61 2739.25,1163.75 C19.2 ; U5.8 2886.89,2130.19 2829.69,2130.19 2827.5,2128 C20.1 2748.5,2128 2736.5,2116 2736.5,2102.5 2710,2076 2710,1859.72 2756.72,1813 3070.28,1813 3082,1801.28 C15.1 3092.74,1557.26 3092.74,1518.81 3104.46,1507.1 3152.1,1507.1 ; v1(3268,1024) 3268.96,1023.04 3268.96,1007.54 3311.5,965 C13.2 3338.5,965 3368,935.5 U2.6 ; v1(3324,1406) 3324,1447.5 3332,1455.5 ; C8.1 3816,1575 3816,1539.75 3757.96,1481.72 3757,1481.72 3730.78,1455.5 3332,1455.5 ; 2145.5,1252.5 2409.28,1252.5 ; 2409.28,1252.5 2724.28,1252.5 2736,1240.78 2736,1167 C19.2 ; C19.2 2811,1166 3152.1,1507.1 ; 3152.1,1507.1 3187.6,1542.6 U4.3 3239,1541.6 3239,1486.72 3270.22,1455.5 3324,1455.5 3332,1455.5
  Bottom Layer 1 w20: v1(3268,1024) 3261,1031 3261,1150.32 3324,1213.32 v1(3324,1406)
+5V: D1.5 J2.4 L1.2 LED3.1 LED4.1 R1.2 R2.2 TP_In-rush_I.3 TP_In-rush_I.4 | length 7944.8
  Top Layer 1 w20: TP_In-rush_I.3 TP_In-rush_I.4 244,1390 436,1198 R2.2 436,610.72 447.72,599 1485.5,599 R1.2@1549.5,535 ; LED4.1 549.5,1791.5 549.5,2030.5 LED3.1 553,2047.5 595.45,2089.95 641.17,2089.95 641.72,2090.5 1012.5,2090.5 1082,2021 1151.69,2021 1203.69,1969 1235,1969 1254.46,1969 ; D1.5 1262.28,2115.6 1274,2103.88 1274,2040.83 1256.31,2023.14 1256.31,1970.85 1254.46,1969 ; v1(2710,240) 2710.5,240.5 2847.5,240.5 J2.4 2848,254.53 2869.71,276.24 2869.71,511.28 2857.99,523 R1.2 1561.5,523 R1.2@1549.5,535 ; 3236,292 3244.72,292 ; v1(3238,134) 3238,205.32 3233,210.32 3233,280.28 3244.72,292 ; L1.2 3244.72,292 ; 1254.46,1969 1293.28,1969 1305,1957.28 1305,1943.22 1316.72,1931.5 1389,1931.5 1415.36,1905.14 1450.64,1905.14 1549.5,1806.28 R1.2@1549.5,535
  Bottom Layer 1 w20: v1(2710,240) 2709.04,240.96 2692.47,240.96 2692.22,241.22 2658,207 2658,44.72 2669.72,33 3137,33 v1(3238,134)
ADP_+5V: 1.1 "POWER ON.1" C3.2 LED1.1 P1.1 | length 1784.9
  Top Layer 1 w20: 1.1 170,405 187,388 550,388 569,369 569,262.78 P1.1 620.28,255 632,243.28 ; 800,140 647.72,140 632,155.72 632,243.28 ; LED1.1 998,526 782,526 C3.2 665,524 632,491 632,243.28
Buzzer: BZ1.1 TP10.1 U2.1 | length 3028.4
  Top Layer 1 w20: TP10.1 1864,435 1888,411 1888,313.72 1899.72,302 BZ1.1 2212.05,372.05 v1(2288,448) ; U2.1 3656,860.35 3666.65,871 v1(3668,871)
  Bottom Layer 1 w20: v1(2288,448) 2990.18,448 3045.18,393 3746,393 3829,476 3829,864.28 3817.28,876 3673,876 v1(3668,871)
CH340_RxD: R7.1 TP9.1 U2.30 U3.2 | length 5160.6
  Top Layer 1 w20: R7.1 920.28,2031.72 920.28,1968.42 969.69,1919 U3.2 1105,1919 1122,1902 v1(1122,1897) ; U2.30 3686.07,743.93 ; v1(3763,667) 3686.07,743.93 ; TP9.1 3906.47,725 3887.54,743.93 3686.07,743.93
  Bottom Layer 1 w20: v1(1122,1897) 1122,1734.96 1155,1701.96 1155,773 1566,362 1635,362 1714,441 1714,644.28 1725.72,656 3167.28,656 3179,644.28 3179,487.72 3190.72,476 3572,476 v1(3763,667)
CH340_TxD: R8.1 TP12.1 U2.31 U3.3 | length 5019.8
  Top Layer 1 w6: v1(829,1892) 886,1892 R8.1 ; U2.31 3721.93,775.93 v1(3771,825)
  Top Layer 1 w20: R8.1 888,1892 945.61,1892 968.61,1869 U3.3 ; 3721.93,775.93 3816.93,775.93 3925,884 TP12.1
  Bottom Layer 1 w6: v1(829,1892) 829,2027 1032,2230 1496,2230 1545.56,2180.44 1545.56,2176.56 1580.12,2142 1615.88,2142 1777,1980.88 1777,1970.12 2216.28,1530.84 2793.53,1530.84 3232.5,1091.87 3232.5,954.97 3251.47,936 3450.49,936 3454,932.49 3454,866.4 3405.5,817.9 3405.5,705.92 3478.17,603.29 3497.95,587.18 ccw(c3514,607) 3532.29,589.23 3567.9,625.9 3767,825 v1(3771,825)
DAC_Vout: TP7.1 U4.1 U5.3 | length 1953.6
  Top Layer 1 w6: TP7.1 2362.18,2102.18 2362.18,2130.06 2466.12,2234 2624.06,2234 2671.06,2281 2828.99,2281 2853.18,2256.81 2924.6,2256.81 2940.6,2240.81 3092.49,2240.81 U5.3 3101.3,2252.81 3105.68,2257.19 3137.2,2257.19 3144.81,2264.8 3144.81,2299.2 3113.5,2330.51 3093.49,2330.51 v1(3092,2332) ; v1(3236,1659) 3236,1619.4 U4.1
  Bottom Layer 1 w6: v1(3092,2332) 3092,2067.93 3236,1923.93 v1(3236,1659)
GND: "POWER ON.2" BZ1.2 C1.2 C2.1 C3.1 C4.1 C5.1 C6.1 C7.1 C8.2 C9.1 C10.1 C11.1 C13.1 C14.2 C15.2 C16.1 C17.1 C18.2 C19.1 C20.2 D1.2 D2.3 D3.3 D4.3 D5.3 J1.5 J1.6 J1.7 J1.8 J1.9 J2.6 LED2.2 P1.2 P1.3 P2.2 P3.2 P3.3 R3.1 R9.2 R15.1 R16.1 SW1.3 SW1.4 TP1.2 TP4.2 TP5.2 TP6.2 TP7.2 TP8.2 TP9.2 TP10.2 TP11.2 TP12.2 TP13.2 TP14.2 TP15.2 U1.1 U1.3 U2.3 U2.5 U2.21 U3.1 U4.2 U5.4 Y1.2 Y1.4 Y2.2 Y2.4 | length 4407.1
  Top Layer 1 w6: v1@3416.35,1568 3425.35,1577 U1.3
  Top Layer 1 w20: J1.9 182.46,1753.55 195.04,1766.13 195.04,1820.04 v1(196,1821) 196,1822.35 168.75,1849.61 J1.8 ; v1(286,2092) 286.29,2092 331.84,2046.45 J1.6 ; C6.1 344,1379 v1(344,1438) ; P1.2@352.13,227.51 325,254.65 P1.2 426,255 443.02,237.98 443.02,237.33 465,215.35 v1(465,214) 465,212.65 462.8,210.44 P1.3 ; J1.7 346.2,1753.55 333.61,1766.13 333.61,1789.39 v1(310,1813) 360.66,1813 383.88,1836.22 J1.5 ; v1(378,2153) C2.1 ; v1(554,1400) 554.19,1400.19 610.81,1400.19 Y1.4 ; Y1.2 685.98,1495.04 721.04,1495.04 v1(722,1496) ; C14.2 825.65,1782 827.65,1780 v1(829,1780) ; C3.1 779,407 781,409 v1(781,466) ; v1(780,1455) 780,1512 C4.1 ; U3.1 1111.65,1969 1119.65,1961 v1(1121,1961) ; D1.2 1099.69,2113.91 1131.87,2113.91 v1(1132.83,2112.96) ; R3.1 1217,522 v1(1217,466) ; SW1.3 1389.7,156.94 1408.65,138 v1(1410,138) ; C1.2 1398,520 v1(1398,467) ; v1(1406,1985) 1463,1985 C10.1 ; SW1.4 1581.92,214.57 1584,216.65 v1(1584,218) ; D4.3 1702.5,751.37 1740.04,788.91 1740.04,813.04 v1(1741,814) ; C18.2 1715,1174 v1(1775,1174) ; D2.3 2006.5,753.37 2063.04,809.91 2063.04,815.04 v1(2064,816) ; C16.1 v1(2093,1168) ; D3.3 2300.5,749.37 2358.13,807 v1(2359,807) ; C17.1 2305,1163 v1(2360,1163) ; v1(2467,405) 2467.48,404.52 2467.48,302.48 BZ1.2 ; D5.3 2614.5,746.37 2666.04,797.91 2666.04,811.04 v1(2667,812) ; C19.1 2621,1168 v1(2677,1168) ; v1(2762,2188) C20.2 ; R16.1 2942,1882 v1(2942,1942) ; C15.2 2965,1569 v1(3024,1569) ; v1(2996,2269) 2997.35,2269 3010.35,2282 U5.4 ; v1(3023,995) Y2.4 ; C5.1 3037,865 v1(3093,865) ; J2.6 3048,330.65 3050,332.65 v1(3050,334) ; v1(3104,1940) 3104,1997 R15.1 ; v1(3145,1262) 3201,1262 C7.1 ; Y2.2 3150.15,1081.46 3206.85,1081.46 v1(3207,1081.31) ; v1(3150.25,1580.75) 3150.62,1580.38 3237.62,1580.38 U4.2 ; C13.1 3338.5,1083 3350.5,1071 3350.5,1044.71 3355.36,1039.85 v1(3355.36,1038.5) ; U2.5 3399,823.56 3412.72,809.84 3427.15,809.84 3429.65,807.34 v1(3431,807.34) 3431.96,808.3 3447.74,808.3 3462,822.56 U2.3 ; v1(3415,1568) v1@3416.35,1568 ; C11.1 3432,1081 v1(3432,1024) ; U2.21 v1(3431,614) ; C9.1 3476,297 v1(3476,355) ; LED2.2 3682.65,235 3685.65,232 v1(3687,232) ; P3.3 3954.93,2453.07 v1(3999,2409) ; v1(3902.5,1587) C8.2 ; P3.2 3996.24,2281.24 3996.24,2343.76 3999,2346.52 v1@3999,2407.65 ; R9.2 v1(4015,1939) ; P2.2 4145.5,1450.6 4145.5,1323.5 v1(4146,1323)
LED: D5.4 U2.32 | length 2161.5
  Top Layer 1 w6: D5.4 v1@2829.64,737.64 ; v1(2831,739) 2881.5,789.5 2881.5,1132.38 3095.12,1346 3747,1346 3785,1308 3785,903 3688.93,806.93 U2.32
  Top Layer 1 w20: v1@2829.64,737.64 v1(2831,739)
Net1_2: 1.2 R2.1 TP_In-rush_I.1 TP_In-rush_I.2 | length 612
  Top Layer 1 w20: 1.2 245,865 245,1020 TP_In-rush_I.1 ; TP_In-rush_I.2 TP_In-rush_I.1 ; R2.1 318,1078 306,1090 TP_In-rush_I.1
Net2_1: 2.1 P2.1 | length 222.2
  Top Layer 1 w20: P2.1 4220,1663.9 2.1
Net2_3: 2.3 P3.1 | length 591.3
  Top Layer 1 w20: P3.1 3774.21,2244.57 3854.22,2244.57 4118.78,1980 2.3
Net3_1: 3.1 R13.1 | length 411.5
  Top Layer 1 w20: 3.1 3542,2395 3565,2372 R13.1
Net3_3: 3.3 R14.2 | length 271.1
  Top Layer 1 w20: 3.3 3205,2168.5 3227,2146.5 R14.2
NetC9_2: C9.2 L1.1 U2.18 | length 255.5
  Top Layer 1 w20: U2.18 3336,416 L1.1 3335.5,414.5 3474.5,414.5 C9.2
NetC11_2: C11.2 U2.4 | length 105.1
  Top Layer 1 w20: C11.2 3430,881.87 3431,880.87 U2.4
NetC12_2: C12.2 U3.13 | length 117.8
  Top Layer 1 w6: U3.13 1333,1819 C12.2
NetC14_1: C14.1 U3.4 | length 135.5
  Top Layer 1 w20: C14.1 889,1783 922,1783 934,1795 934,1807.28 944.95,1818.23 1000.23,1818.23 U3.4
NetD2_2: D2.2 D4.4 | length 357.4
  Top Layer 1 w6: D4.4 1886.64,742.64 1928,784 1928,945.85 1931.51,949.36 D2.2
NetD2_4: D2.4 D3.2 | length 347.8
  Top Layer 1 w20: D2.4 2173.28,744.64 2185,756.35 2185,923 2207.36,945.36 D3.2
NetD3_4: D3.4 D5.2 | length 363.5
  Top Layer 1 w20: D3.4 2463.28,740.64 2475,752.35 2475,911 2500,936 2608.14,936 D5.2
NetLED1_2: LED1.2 R3.2 | length 216.7
  Top Layer 1 w20: LED1.2 1002,408 1213,408 R3.2
NetLED2_1: LED2.1 R4.2 | length 161.2
  Top Layer 1 w20: R4.2 3746.5,393.5 3746.5,236.5 LED2.1
NetLED3_2: LED3.2 R7.2 | length 128.4
  Top Layer 1 w6: LED3.2 798,2034 R7.2
NetLED4_2: LED4.2 R8.2 | length 174.6
  Top Layer 1 w20: LED4.2 712,1788 726,1802 726,1834.5 769,1877.5 R8.2
NetLED5_2: LED5.2 R9.1 | length 175
  Top Layer 1 w6: LED5.2 R9.1
Op_Amp_Vout: Q1.1 TP14.1 TP15.1 U5.1 | length 1717.5
  Top Layer 1 w20: TP15.1 TP14.1 1826.04,1991.04 1931.04,1991.04 v1(1932,1992) ; v1(2760,1890) 2761,1891 2761,1896 2761.41,1896.41 Q1.1 2773.61,1935.6 2878.02,2040 2913.43,2040 3005.43,2132 U5.1
  Bottom Layer 1 w20: v1(1932,1992) 1932,1990.65 1942,1980.65 1942,1901.72 1953.72,1890 v1(2760,1890)
R_sense+: 3.2 Q1.2 U1.6 U5.2 | length 2413.6
  Top Layer 1 w6: 3.2 3305,2223.72 3329.97,2198.75 3464.03,2198.75 3516.63,2146.16 3516.63,2092.59 3548.78,2060.44 3693.35,2060.44 3725.5,2028.28 3725.5,1967.72 3717.28,1959.5 3658.44,1959.5 3614.5,1915.56 3614.5,1780.56 3785,1610.06 3785,1541.28 3781.49,1537.76 U1.6@3658.75,1537.76
  Top Layer 1 w20: Q1.2 2773.61,2010.4 2863.4,2100.19 2931.19,2100.19 3013,2182 U5.2 3103.11,2183.81 3121.81,2183.81 3138.19,2200.19 3140.1,2200.19 3167.81,2227.9 3167.81,2326.3 3152.52,2341.59 3152.52,2439.99 3179.53,2467 3293.28,2467 3305,2455.28 3.2
R_sense-: R13.2 R14.1 R16.2 U1.7 | length 1475.7
  Top Layer 1 w6: v1(3442,2051) 3442,2125 R13.2 ; U1.7 3659.39,1558.09 3764.49,1558.09 3768,1561.61 3768,1591 v1(3704,1655)
  Top Layer 1 w20: R16.2 2953.5,1998 3014.25,2058.75 3284.25,2058.75 3345,2119.5 R14.1 3444,2133 R13.2
  Bottom Layer 1 w6: v1(3442,2051) 3442,1942 3450,1934 3591.49,1934 3595,1930.49 3595,1767 3687,1675 3687,1665 3688,1664 3689.86,1664 3698.86,1655 v1(3704,1655)
RESET: C1.1 C12.1 J2.3 R1.1 SW1.1 SW1.2 U2.29 | length 5827.7
  Top Layer 1 w6: SW1.1@1327.98,275.06 SW1.1 1322.08,317.08 1341,336 1390,336 1395,341 C1.1 R1.1 ; v1(1459,1723) C12.1@1459,1793 ; v1(1571,464) 1574,461 1574,460 1575,459 R1.1 ; SW1.2 1575,281.98 R1.1 ; J2.3 3049.5,139.5 3164.5,139.5 v1(3166,138) ; v1(3496.29,756) 3501.14,756 3512.53,744.61 3513.39,744.61 3517.64,740.36 3517.64,722.63 3527.33,712.93 U2.29
  Top Layer 1 w20: SW1.1@1327.98,275.06 1423.09,179.94 1459.06,179.94 1583,56 2963,56 J2.3
  Bottom Layer 1 w6: v1(1459,1723) 1460,1722 1460,575 v1(1571,464) ; v1(3166,138) 3169.49,138 3173,141.51 3173,325.99 3176.51,329.5 3610.47,329.5 3619.97,339 3765,339 3867,441 3867,858.81 3799.81,926 3794.84,926 3663.47,899 3653.32,891.85 ccw(c3668,871) 3651.34,890.3 ccw(c3668,871) 3651.27,890.25 v1(3496.29,756)
SCL: TP11.1 U1.10 U2.28 U4.5 | length 2062.5
  Top Layer 1 w6: U4.5 3374,1580 3381,1587 3381,1649.49 3384.51,1653 3657.49,1653 3661,1649.49 3661,1618.76 U1.10 3621.32,1616.37 3621.19,1616.5 3598.49,1616.5 3591.49,1623.5 3557.44,1623.5 3542.5,1608.56 3542.5,1576.5 3553.18,1565.82 3553.18,1558.84 3564.44,1547.58 v1(3564.44,1542.44) ; v1(3497,685) 3576.28,685 U2.28
  Top Layer 1 w20: U2.28 3654.07,680.93 3876.54,458.46 3911.54,458.46 TP11.1
  Bottom Layer 1 w6: v1(3497,685) 3472.57,746.66 cw(c3496.29,756) 3470.8,756.38 3470.86,760.31 3483.26,840.5 3483.26,850.41 3576,943.15 3576,1234.44 3564.44,1246 v1(3564.44,1542.44)
SDA: TP8.1 U1.9 U2.27 U4.4 | length 2317.5
  Top Layer 1 w6: U4.4 3380.4,1542.6 3388,1535 3388,1503.51 3413.01,1478.5 3574.99,1478.5 3589.94,1493.45 3589.94,1553 3578.5,1564.44 3578.5,1585.56 3590.94,1598 ; v1(3502.99,615.96) 3499.36,619.6 3499.36,636.74 3499,637.1 3499,646.41 3502.51,649.93 U2.27 ; v1(3568,1598) 3590.94,1598 ; U1.9@3658.61,1595.91 3657.83,1596.68 3618.38,1596.68 3614.56,1600.5 3593.44,1600.5 3590.94,1598
  Top Layer 1 w20: U2.27 3630.07,649.93 3926,354 3926,186 TP8.1
  Bottom Layer 1 w6: v1(3502.99,615.96) 3464.57,673.05 3454.61,752.92 cw(c3496,756) 3454.76,760.67 3454.86,761.51 3467.17,856.95 3470,859.78 3470,1063.07 3538.94,1132.01 3538.94,1568.94 v1(3568,1598)
USB_+5V: 1.3 C2.2 J1.1 TP1.1 | length 2007.3
  Top Layer 1 w20: TP1.1 95,2188 130,2153 272.72,2153 ; 1.3 88,890 66,912 66,1537 242,1713 242,2022 ; C2.2 272.72,2153 ; J1.1 383.88,1962.2 367.09,1979 285,1979 242,2022 ; 242,2022 242,2122.28 272.72,2153
USB_D+: D1.1 J1.3 TP5.1 U3.5 | length 1653.6
  Top Layer 1 w6: J1.3 445.28,1899.22 457,1910.93 457,2070 594,2207 ; TP5.1 594,2207 ; v1(935.5,1753.44) 951.06,1769 U3.5 ; v1(1021,2152) 1022,2153 D1.1@1092.09,2153 ; D1.1 D1.1@1092.09,2153 ; 594,2207 1038.09,2207 D1.1@1092.09,2153
  Bottom Layer 1 w6: v1(935.5,1753.44) 935.5,1757 929,1763.5 929,2060 v1(1021,2152)
USB_D-: D1.3 J1.2 TP6.1 U3.6 | length 1966.8
  Top Layer 1 w6: U3.6 1002,1718 1093,1718 v1(1094,1717) ; v1(1038.48,2110.48) 1038.48,2107.03 1089.51,2056 1094.49,2056 1098,2059.51 D1.3 1154.81,2078.2 1158.33,2081.71 1158.33,2209.67 1082,2286 TP6.1
  Top Layer 1 w20: J1.2 284.72,1930.72 273,1919 273,1735 311,1697 917,1697 939,1719 U3.6
  Bottom Layer 1 w6: v1(1038.48,2110.48) 1038.48,1773.52 1094,1718 v1(1094,1717)
VRM+: R10.1 R11.2 R12.2 TP4.1 U1.4 | length 2123.2
  Top Layer 1 w6: TP4.1 2533,1982 2580,2029 v1(2596,2029) ; U1.4 3486.17,1556.54 3519.71,1556.54 3527.32,1548.92 3527.32,1526.34 3507.5,1506.52 3488.52,1506.52 v1(3486,1504)
  Top Layer 1 w20: v1(3315,1943) R12.2 R11.2 R10.1
  Bottom Layer 1 w6: v1(2596,2029) 2743.57,2029 3172.57,1600 3315,1600 ; v1(3315,1943) 3315,1600 ; v1(3486,1504) 3482.49,1500.49 3482.49,1495 3420,1495 3315,1600
VRM-: R11.1 R12.1 R15.2 U1.5 | length 866.8
  Top Layer 1 w6: v1(3439.46,1536.66) 3439.66,1536.66 3440.63,1537.63 U1.5 ; R11.1 3511,1879 v1(3511,1832)
  Top Layer 1 w20: R15.2 R12.1 R11.1
  Bottom Layer 1 w6: v1(3439.46,1536.66) 3439.46,1556.39 3440.5,1557.44 3440.5,1830.49 3444.01,1834 3509,1834 v1(3511,1832)
Vth: 2.2 LED5.1 Q1.3 R10.2 TP13.1 | length 2969.8
  Top Layer 1 w20: TP13.1 2146,1884 2598,1884 2661,1947 2661,1971.41 Q1.3 2662.59,2182.59 2664,2184 v1(2664,2193) ; v1(3669,1934) 3669,1881 R10.2 LED5.1 3853.5,1880 3895.5,1838 4173.64,1838 4215.64,1880 2.2
  Bottom Layer 1 w20: v1(2664,2193) 2721.04,2193 2764.54,2236.5 3009.46,2236.5 3044,2271.04 3044,2329.96 3078.54,2364.5 3161.28,2364.5 3405.78,2120 3658.28,2120 3670,2108.28 3670,1938 3669,1937 v1(3669,1934)
pads on no net: D1.4 D1.6 D4.2 J1.4 U1.2 U2.2 U2.9 U2.10 U2.11 U2.12 U2.13 U2.14 U2.19 U2.20 U2.22 U2.23 U2.24 U2.25 U2.26 U3.9 U3.10 U3.11 U3.12 U3.14 U3.15 U4.6 U5.5 U5.6 U5.7

## Polygon pours and split planes (outlines as drawn)
GND on Ground 1 "GND_L02_P000" (solid, pour order 0): 0,2500 4300,2500 4300,0 0,0
GND on Ground 2 "GND_L03_P001" (solid, pour order 1): 0,2500 4300,2500 4300,0 0,0

## Keep-outs
Keep-Out Layer:
  lines w20: 3505,0 0,0 ; 3505,2510 0,2510 ; 0,0 4315,0 4315,2510 0,2510 ; 0,0 0,2510 ; 0,0 0,2510

## Silkscreen, mask and mechanical layers (free items; w line width, h text height)
Top Overlay:
  text "Instrument Droid" at 536,1135 h80
  text "Vaishnavi Patekar" at 503,996 h60